# EAGLE board bluesbreakerpcb (EAGLE 5.06)
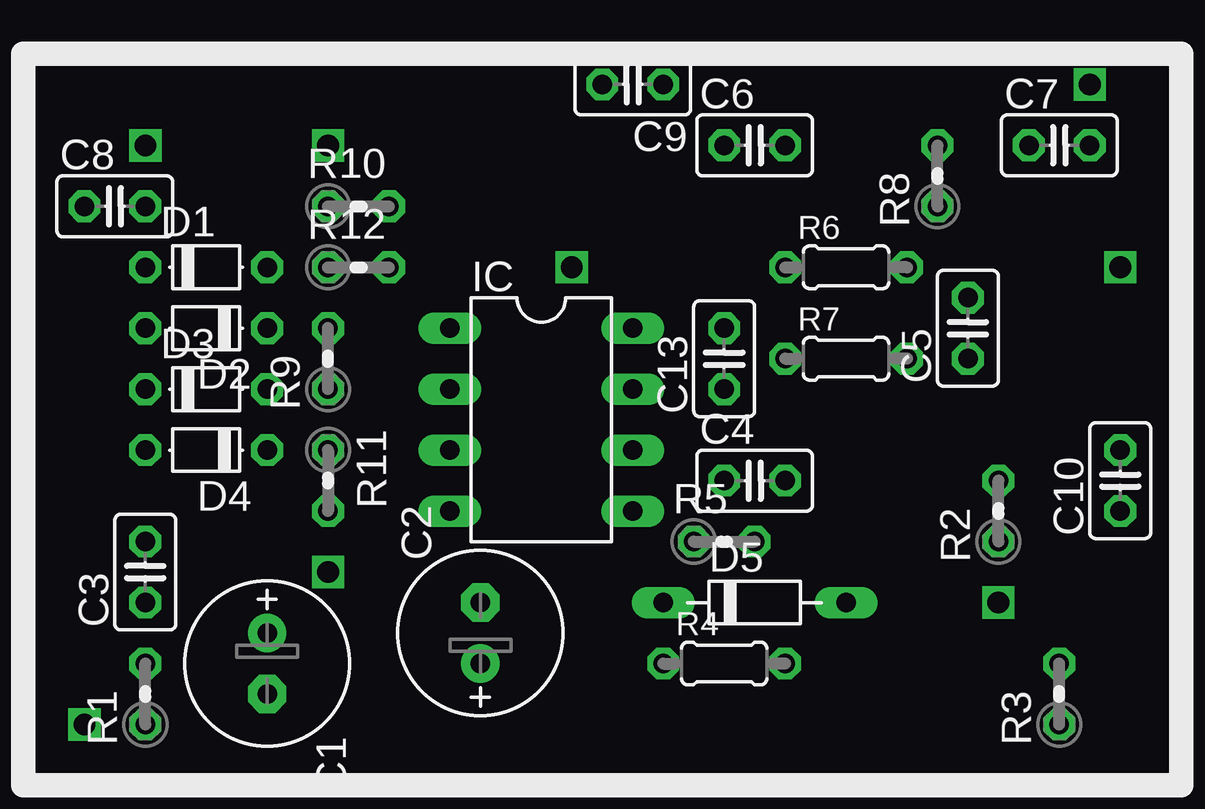
[diagram p0: board, top side]
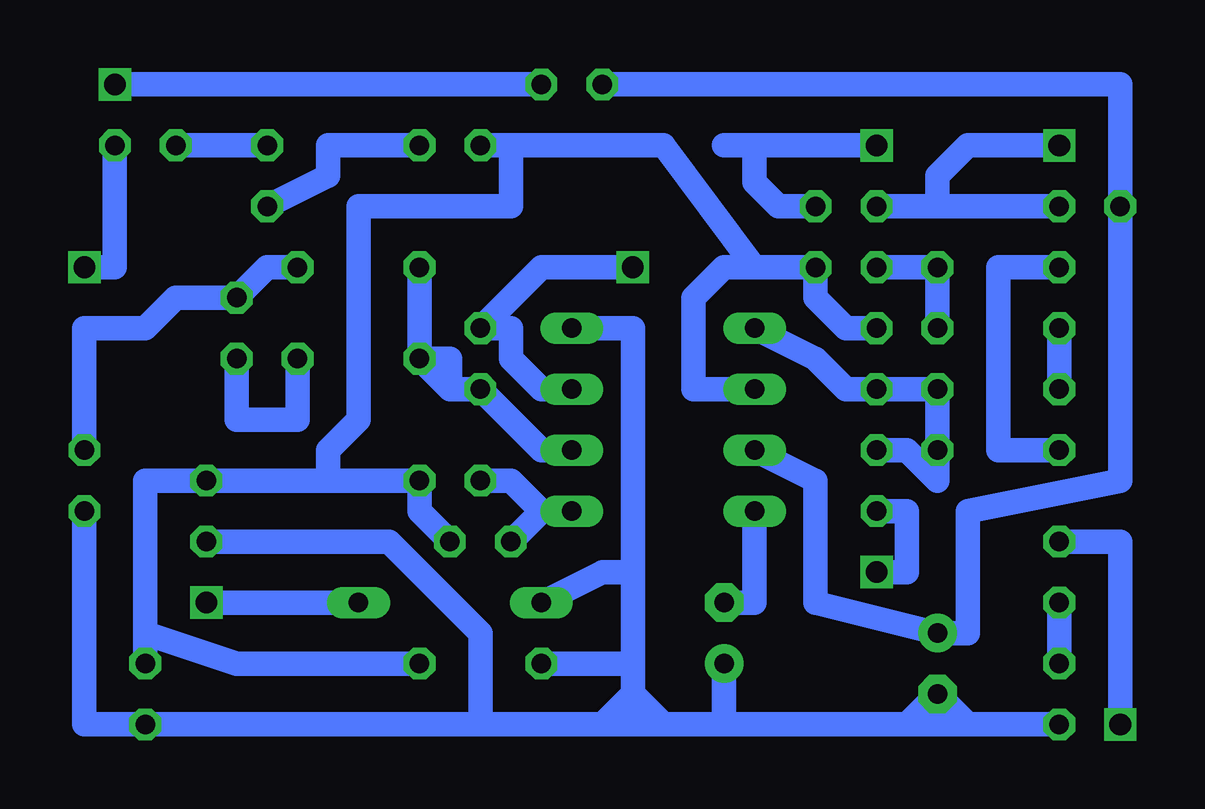
[diagram p1: board, bottom side, seen from below]

No outline drawn. Coordinates in mm, seen from the top.
Copper layers (1*16): Top 0.035mm / dielectric 1.5mm / Bottom 0.035mm
Design rules "default": minimum track width 10mil, minimum drill 24mil, track to track 8mil, track to pad 8mil, pad to pad 8mil, via to via 8mil, smd to smd 8mil, copper to edge 40mil, drill to drill 8mil, minimum pad ring 10mil, minimum via ring 8mil, stop-mask expansion 4mil, vias tented up to drill 0mil, thermal gap 10mil

## Footprints (pad centres in the part's own frame; a part is rotated, then mirrored left to right if it is on the bottom)
E2,5-7 = drill 0.813 pad 1.6 round: + -1.27,0 | drill 0.813 pad 1.6 octagon: - 1.27,0
C025-025X050 = drill 0.813 octagon: 1 -1.27,0; 2 1.27,0
D-5 = drill 0.813 octagon: A 2.54,0; C -2.54,0
D-7.5 = drill 0.813 long: A 3.81,0; C -3.81,0
DIL08 = drill 0.813 long: 1 -3.81,-3.81; 2 -1.27,-3.81; 3 1.27,-3.81; 4 3.81,-3.81; 5 3.81,3.81; 6 1.27,3.81; 7 -1.27,3.81; 8 -3.81,3.81
0204V = drill 0.813 octagon: 1 -1.27,0; 2 1.27,0
0204/5 = drill 0.813 octagon: 1 -2.54,0; 2 2.54,0

## Placement (x,y rotation side)
C1  100uF  [E2,5-7]  34.29,7.62 270 top
C2  100uF  [E2,5-7]  43.18,8.89 90 top
C3  100n  [C025-025X050]  29.21,11.43 90 top
C4  10n  [C025-025X050]  54.61,15.24 0 top
C5  10n  [C025-025X050]  63.5,21.59 90 top
C6  220n  [C025-025X050]  54.61,29.21 0 top
C7  220n  [C025-025X050]  67.31,29.21 0 top
C8  10n  [C025-025X050]  27.94,26.67 0 top
C9  10n  [C025-025X050]  49.53,31.75 180 top
C10  10n  [C025-025X050]  69.85,15.24 90 top
C13  10pF  [C025-025X050]  53.34,20.32 90 top
D1  1N4148  [D-5]  31.75,24.13 0 top
D2  1N4148  [D-5]  31.75,21.59 180 top
D3  1N4148  [D-5]  31.75,19.05 0 top
D4  1N4148  [D-5]  31.75,16.51 180 top
D5  1n4001  [D-7.5]  54.61,10.16 0 top
IC  TL072  [DIL08]  45.72,17.78 270 top
R1  1M  [0204V]  29.21,6.35 90 top
R2  2M2  [0204V]  64.77,13.97 90 top
R3  47K  [0204V]  67.31,6.35 90 top
R4  47K  [0204/5]  53.34,7.62 0 top
R5  1M  [0204V]  53.34,12.7 0 top
R6  27K  [0204/5]  58.42,24.13 0 top
R7  33K  [0204/5]  58.42,20.32 0 top
R8  10K  [0204V]  62.23,27.94 90 top
R9  220K  [0204V]  36.83,20.32 90 top
R10  6K8  [0204V]  38.1,26.67 0 top
R11  1K  [0204V]  36.83,15.24 270 top
R12  6K8  [0204V]  38.1,24.13 0 top

## Library data of the parts
C1-C10 C13 R1-R12 = rcl
D1-D5 = diode
IC = analog-devices

## Nets
S$1: D5.A
S$2: C3.1 R1.2
S$3: C3.2
S$4: C1.+ C8.1 C9.2 IC.3
S$5: C2.- IC.4
S$6: D3.A D4.C IC.1 R9.1 R11.1
S$7: R10.2
S$8: C13.2 IC.7
S$9: C13.1 IC.6 R6.1 R7.1
S$10: C4.1 IC.5 R5.1
S$11: C8.2 R10.1
S$12: C1.- C2.+ C10.1 D5.C IC.8 R1.1 R2.1 R3.1 R4.1
S$13: C5.1 R7.2
S$14: D2.A D3.C
S$15: C6.2 R8.1
S$16: D1.A D2.C R12.1
S$18: D1.C D4.A
S$19: R11.2
S$20: C7.2
S$21: C7.1 R8.2
S$22: C9.1
S$23: C5.2 C10.2 R6.2
S$25: C4.2 C6.1 IC.2 R2.2 R3.2 R4.2 R5.2 R9.2 R12.2

## Tracks (layer width: path | path; a pad name or v marks a point on that pad's centre or on a via)
S$1  (via drill 0.9)
  Bottom 1.016: D5.A v64.77,10.16
S$2
  Bottom 1.016: R1.2 C3.1
S$3  (via drill 0.9)
  Bottom 1.016: C3.2 26.67,12.7 v26.67,5.08
S$4
  Bottom 1.016: C9.2 26.67,31.75 C8.1 26.67,15.24 33.02,13.97 33.02,8.89 C1.+ 39.37,10.16 39.37,15.24 IC.3
S$5
  Bottom 1.016: IC.4 41.91,10.16 C2.-
S$6
  Bottom 1.016: R11.1 35.56,16.51 34.29,15.24 D4.C D3.A R9.1 38.1,19.05 39.37,20.32 IC.1
S$7  (via drill 0.9)
  Bottom 1.016: v36.83,29.21 41.91,29.21 | 41.91,29.21 43.18,29.21 | R10.2 40.91,26.67 41.91,27.67 41.91,29.21
S$8  (via drill 0.9)
  Bottom 1.016: IC.7 50.8,19.05 52.07,20.32 52.07,21.59 C13.2 50.8,24.13 v46.99,24.13
S$9
  Bottom 1.016: IC.6 50.8,16.51 C13.1 54.61,19.05 | 54.61,19.05 54.61,20.32 R7.1 | 54.61,19.05 R7.1 | R7.1 R6.1
S$10
  Bottom 1.016: IC.5 50.8,13.97 | 50.8,13.97 52.07,15.24 C4.1 | 50.8,13.97 R5.1
S$11  (via drill 0.9)
  Bottom 1.016: v29.21,29.21 33.02,29.21 34.29,27.94 34.29,26.67 | 34.29,26.67 R10.1 | C8.2 34.29,26.67
S$12
  Bottom 1.016: D5.C 48.26,11.43 46.99,11.43 | IC.8 46.99,21.59 46.99,11.43 | C10.1 69.85,5.08 60.96,5.08 | 60.96,5.08 R3.1 | R2.1 57.15,12.7 53.34,8.89 53.34,5.08 | 46.99,7.62 46.99,11.43 | 46.99,7.62 R4.1 | 54.61,5.08 55.88,5.08 | 54.61,5.08 60.96,5.08 | 53.34,5.08 54.61,5.08 | 46.99,6.35 46.99,7.62 | 45.72,5.08 46.99,6.35 | 45.72,5.08 46.99,5.08 | 46.99,5.08 48.26,5.08 | 48.26,5.08 53.34,5.08 | 43.18,5.08 45.72,5.08 | 35.56,5.08 43.18,5.08 | 34.29,5.08 C1.- | 34.29,5.08 35.56,5.08 | R1.1 33.02,5.08 | 33.02,5.08 34.29,5.08 | 43.18,5.08 C2.+ | 46.99,6.35 46.99,5.08 | 46.99,6.35 48.26,5.08 | 33.02,5.08 C1.- | C1.- 35.56,5.08
S$13
  Bottom 1.016: R7.2 60.96,17.78 63.5,17.78 C5.1
S$14
  Bottom 1.016: D3.C D2.A
S$15
  Bottom 1.016: R8.1 59.69,27.94 59.69,29.21 C6.2
S$16
  Bottom 1.016: D2.C D1.A R12.1
S$18
  Bottom 1.016: D4.A 31.75,16.51 31.75,24.13 D1.C
S$19  (via drill 0.9)
  Bottom 1.016: R11.2 35.56,13.97 35.56,11.43 v36.83,11.43
S$20  (via drill 0.9)
  Bottom 1.016: C7.2 68.58,24.13 v69.85,24.13
S$21
  Bottom 1.016: R8.2 C7.1
S$22  (via drill 0.9)
  Bottom 1.016: C9.1 v68.58,31.75
S$23
  Bottom 1.016: R6.2 62.23,24.13 C5.2 66.04,22.86 67.31,21.59 69.85,21.59 C10.2
S$25
  Bottom 1.016: R5.2 55.88,13.97 C4.2 R2.2 59.69,15.24 | 59.69,15.24 59.69,16.51 58.42,17.78 58.42,26.67 52.07,26.67 52.07,29.21 | 59.69,15.24 67.31,15.24 67.31,8.89 | 67.31,8.89 R3.2 | 67.31,8.89 63.5,7.62 R4.2 | IC.2 44.45,19.05 44.45,22.86 43.18,24.13 41.91,24.13 | 52.07,29.21 45.72,29.21 41.91,24.13 | 52.07,29.21 C6.1 | 41.91,24.13 R12.2 39.37,22.86 38.1,21.59 R9.2